# Altium PCB ATmega_2560_Pro.PcbDoc (part 3 of 4)
Units mil, origin at the board's own origin, x right, y up, seen from the top; angles counter-clockwise.
Board outline 2060 x 2060 mil, 4 copper layers (L1, L2, L3, L4), stack 61.583 mil thick; 50 components, 94 nets, 313 pads, 190 vias.
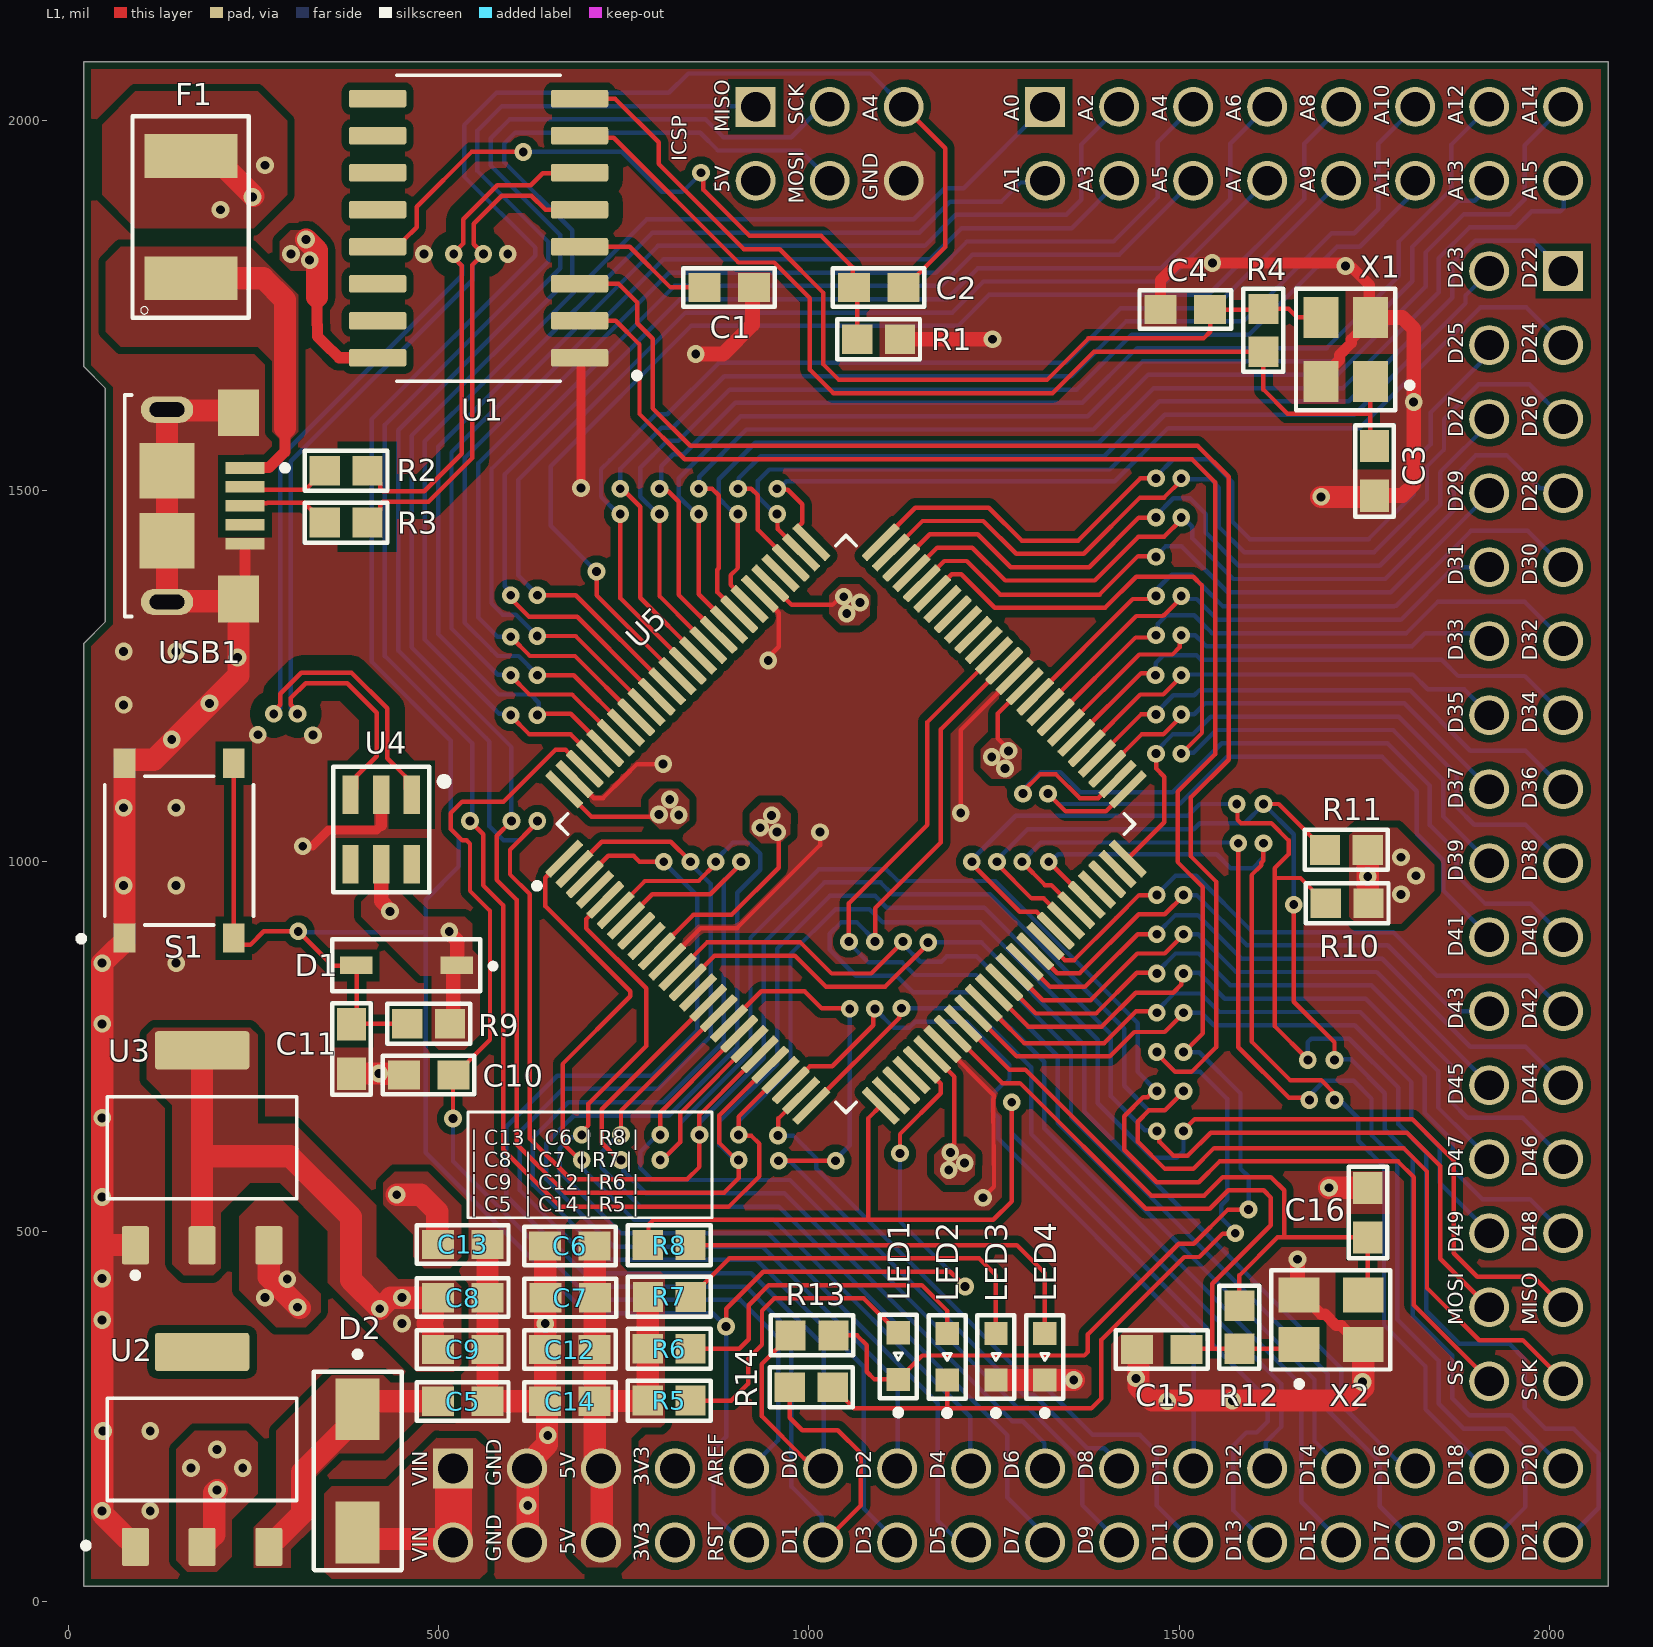
[diagram p0: L1 view]

## Part data (continued)
R5 R6 R7 R8 R13 R14: library part RC0603FR-071KL, "RES 1K OHM 1% 1/10W 0603", Case Code (Imperial)=0603, Manufacturer 1="Yageo Group", Max Operating Temperature=155°C, Min Operating Temperature=-55°C, Power Rating=100mW, Supplier Part Number 1=311-1.00KHRDKR-ND, Temperature Coefficient=100ppm/°C, Tolerance=1%, Voltage Rating=50V, Working Voltage=75V, Case Code (Metric)=0603, Case/Package=0603, China RoHS=Non-Compliant, ComponentLink1Description=https://datasheet.octopart.com:443/RC0603FR-071KL-Yageo-datasheet-175887523.pdf?src-supplier=Newark, ComponentLink1URL=https://datasheet.octopart.com:443/RC0603FR-071KL-Yageo-datasheet-175887523.pdf?src-supplier=Newark, ComponentLink2Description=https://datasheet.octopart.com:443/RC0603FR-071KL-Yageo-datasheet-34211833.pdf?src-supplier=Newark, ComponentLink2URL=https://datasheet.octopart.com:443/RC0603FR-071KL-Yageo-datasheet-34211833.pdf?src-supplier=Newark, ComponentLink3Description=https://datasheet.octopart.com:443/RC0603FR-071KL-Yageo-datasheet-12596169.pdf?src-supplier=Newark, ComponentLink3URL=https://datasheet.octopart.com:443/RC0603FR-071KL-Yageo-datasheet-12596169.pdf?src-supplier=Newark, ComponentLink4Description=https://datasheet.octopart.com:443/RC0603FR-071KL-Yageo-datasheet-499455.pdf?src-supplier=Newark, ComponentLink4URL=https://datasheet.octopart.com:443/RC0603FR-071KL-Yageo-datasheet-499455.pdf?src-supplier=Newark, ComponentLink5Description=https://datasheet.octopart.com:443/RC0603FR-071KL-Yageo-datasheet-503470.pdf?src-supplier=Newark, ComponentLink5URL=https://datasheet.octopart.com:443/RC0603FR-071KL-Yageo-datasheet-503470.pdf?src-supplier=Newark, ComponentLink6Description=https://datasheet.octopart.com:443/RC0603FR-071KL-Yageo-datasheet-62067350.pdf?src-supplier=element14+APAC, ComponentLink6URL=https://datasheet.octopart.com:443/RC0603FR-071KL-Yageo-datasheet-62067350.pdf?src-supplier=element14+APAC, ComponentLink7Description=https://datasheet.octopart.com:443/RC0603FR-071KL-Yageo-datasheet-21426514.pdf?src-supplier=element14+APAC, ComponentLink7URL=https://datasheet.octopart.com:443/RC0603FR-071KL-Yageo-datasheet-21426514.pdf?src-supplier=element14+APAC, ComponentLink8Description=https://datasheet.octopart.com:443/RC0603FR-071KL-Yageo-datasheet-141265859.pdf?src-supplier=Upverter, ComponentLink8URL=https://datasheet.octopart.com:443/RC0603FR-071KL-Yageo-datasheet-141265859.pdf?src-supplier=Upverter, ComponentLink9Description=https://datasheet.octopart.com:443/RC0603FR-071KL-Yageo-datasheet-103092701.pdf?src-supplier=Upverter, ComponentLink9URL=https://datasheet.octopart.com:443/RC0603FR-071KL-Yageo-datasheet-103092701.pdf?src-supplier=Upverter, ComponentLink10Description=https://sigma.octopart.com:443/138820526/technical_drawing/Yageo-RC0603FR-071KL.pdf?src-supplier=Upverter, ComponentLink10URL=https://sigma.octopart.com:443/138820526/technical_drawing/Yageo-RC0603FR-071KL.pdf?src-supplier=Upverter, ComponentLink11Description=https://datasheet.octopart.com:443/RC0603FR-071KL-Yageo-datasheet-68297981.pdf?src-supplier=Upverter, ComponentLink11URL=https://datasheet.octopart.com:443/RC0603FR-071KL-Yageo-datasheet-68297981.pdf?src-supplier=Upverter, ComponentLink12Description=https://datasheet.octopart.com:443/RC0603FR-071KL-Yageo-datasheet-8328172.pdf?src-supplier=Farnell, ComponentLink12URL=https://datasheet.octopart.com:443/RC0603FR-071KL-Yageo-datasheet-8328172.pdf?src-supplier=Farnell, ComponentLink13Description=https://datasheet.octopart.com:443/RC0603FR-071KL-Yageo-datasheet-13691069.pdf?src-supplier=Farnell, ComponentLink13URL=https://datasheet.octopart.com:443/RC0603FR-071KL-Yageo-datasheet-13691069.pdf?src-supplier=Farnell, ComponentLink14Description=https://datasheet.octopart.com:443/RC0603FR-071KL-Yageo-datasheet-15599030.pdf?src-supplier=Seeed+Studio, ComponentLink14URL=https://datasheet.octopart.com:443/RC0603FR-071KL-Yageo-datasheet-15599030.pdf?src-supplier=Seeed+Studio, ComponentLink15Description=https://datasheet.octopart.com:443/RC0603FR-071KL-Yageo-Group-datasheet-176638170.pdf?src-supplier=Future+Electronics, ComponentLink15URL=https://datasheet.octopart.com:443/RC0603FR-071KL-Yageo-Group-datasheet-176638170.pdf?src-supplier=Future+Electronics, ComponentLink16Description=https://datasheet.octopart.com:443/RC0603FR-071KL-Yageo-datasheet-164759695.pdf?src-supplier=Future+Electronics, ComponentLink16URL=https://datasheet.octopart.com:443/RC0603FR-071KL-Yageo-datasheet-164759695.pdf?src-supplier=Future+Electronics, ComponentLink17Description=https://datasheet.octopart.com:443/RC0603FR-071KL-Yageo-datasheet-137700087.pdf?src-supplier=Future+Electronics, ComponentLink17URL=https://datasheet.octopart.com:443/RC0603FR-071KL-Yageo-datasheet-137700087.pdf?src-supplier=Future+Electronics, ComponentLink18Description=https://datasheet.octopart.com:443/RC0603FR071KL-Yageo-datasheet-27584510.pdf?src-supplier=Future+Electronics, ComponentLink18URL=https://datasheet.octopart.com:443/RC0603FR071KL-Yageo-datasheet-27584510.pdf?src-supplier=Future+Electronics, ComponentLink19Description=https://datasheet.octopart.com:443/RC0603FR-071KL-Yageo-datasheet-8324193.pdf?src-supplier=Future+Electronics, ComponentLink19URL=https://datasheet.octopart.com:443/RC0603FR-071KL-Yageo-datasheet-8324193.pdf?src-supplier=Future+Electronics, ComponentLink20Description=https://datasheet.octopart.com:443/RC0603FR-071KL-Yageo-datasheet-79472498.pdf?src-supplier=Megastar, ComponentLink20URL=https://datasheet.octopart.com:443/RC0603FR-071KL-Yageo-datasheet-79472498.pdf?src-supplier=Megastar, ComponentLink21Description=https://datasheet.octopart.com/RC0603FR-071KL-Yageo-datasheet-73766026.pdf, ComponentLink21URL=https://datasheet.octopart.com/RC0603FR-071KL-Yageo-datasheet-73766026.pdf, ComponentLink22Description=https://datasheet.octopart.com:443/RC0603FR-071KL-Yageo-datasheet-118562.pdf?src-supplier=DigiKey, ComponentLink22URL=https://datasheet.octopart.com:443/RC0603FR-071KL-Yageo-datasheet-118562.pdf?src-supplier=DigiKey, ComponentLink23Description=http://sigma.octopart.com:80/conflict_mineral_statement/Yageo-company-3.pdf?src-supplier=Compliance+Statements, ComponentLink23URL=http://sigma.octopart.com:80/conflict_mineral_statement/Yageo-company-3.pdf?src-supplier=Compliance+Statements, ComponentLink24Description=http://sigma.octopart.com:80/rohs_statement/Yageo-company-2.pdf?src-supplier=Compliance+Statements, ComponentLink24URL=http://sigma.octopart.com:80/rohs_statement/Yageo-company-2.pdf?src-supplier=Compliance+Statements, Composition="Thick Film", Contact Plating=Tin, Country of Origin="Mainland China, Taiwan", Depth=800µm, Export Control Classification Number (ECCN) Code=EAR99, Harmonized Tariff Schedule (HTS) Code=8533.21.00.30, Height=450µm, Introduction Date=2004-10-04, Lead Free="Lead Free", Length=1.6mm, Lifecycle Status=Production, Manufacturer Part Number 1=RC0603FR-071KL, Military Standard=Not, Mounting Technology="Surface Mount", Number of Terminals=2, Packaging="Tape and Reel", Pins=2, Pricing 1="1=0.1, 10=0.025, 25=0.0188, 50=0.015, 100=0.0122, 250=0.0094, 500=0.00782, 1000=0.00661 (USD)", Radiation Hardening=No, REACH SVHC=Unaffected, RoHS=Compliant, Schedule B="8533210045, 8533210045|8533210045|8533210045|8533210045|8533210045|8533210045|8533210045|8533210045|8533210045|8533210045|8533210045|8533210045|8533210045|8533210045|8533210045|8533210045|8533210045|8533210045|8533210045|8533210045|8533210045|8533210045|8533210045|85", Stock 1=4851130, Supplier 1=DigiKey, Termination=SMD/SMT, Voltage Rating (DC)=50V, Width=800µm
S1: library part TS-1187A-B-A-B, "SWITCH TACTILE SPST-NO 0.05A 12V SMD 3X4MM"
U1: "USB to Serial UART Interface Controller IC, SOP-16, 5V/3.3V, 12MHz External Crystal Required"
U2: "IC REG LINEAR 5.1V 1A SOT-223-3L", Manufacturer=Revvo, Supplier Part Number=5272-AMS1117-5.0TR-ND, Category="LDO Voltage Regulators", Manufacturer Part Number=AMS1117-5.0, Pricing="2500=0.12353, 5000=0.11968, 7500=0.11775, 12500=0.11561, 17500=0.11436, 25000=0.11316 (USD)", Stock=12500, Supplier=DigiKey
U3: "IC REG LINEAR 3.3V 1A SOT-223-3L", Manufacturer="UMW(Youtai Semiconductor Co., Ltd.)", Supplier Part Number=4518-AMS1117-3.3TR-ND, Category="LDO Voltage Regulators", Manufacturer Part Number=AMS1117-3.3, Pricing="2500=0.1247, 5000=0.12082, 7500=0.11888, 12500=0.11673, 17500=0.11547, 25000=0.11426 (USD)", Stock=20000, Supplier=DigiKey
U4: library part SRV05-4MR6T1G, "TVS DIODE 5VWM 17.5VC 6TSOP", Breakdown Voltage=6V, Case/Package=TSOP, Clamping Voltage=17.5V, Leakage Current=5µA, Manufacturer=onsemi, Manufacturer Lifecycle Status=ACTIVE, Max Operating Temperature=125°C, Min Operating Temperature=-55°C, Peak Pulse Current=5A, Peak Pulse Power=300W, Power Line Protection=Yes, Reverse Standoff Voltage=5V, Supplier Part Number=488-SRV05-4MR6T1GDKR-ND, Category="TVS Diodes", China RoHS=Compliant, ComponentLink1Description=https://datasheet.octopart.com:443/SRV05-4MR6T1G-ON-Semiconductor-datasheet-101150056.pdf?src-supplier=Electro+Sonic, ComponentLink1URL=https://datasheet.octopart.com:443/SRV05-4MR6T1G-ON-Semiconductor-datasheet-101150056.pdf?src-supplier=Electro+Sonic, ComponentLink2Description=https://datasheet.octopart.com:443/SRV05-4MR6T1G-onsemi-datasheet-180969720.pdf?src-supplier=IHS, ComponentLink2URL=https://datasheet.octopart.com:443/SRV05-4MR6T1G-onsemi-datasheet-180969720.pdf?src-supplier=IHS, ComponentLink3Description=https://datasheet.octopart.com:443/SRV05-4MR6T1G-ON-Semiconductor-datasheet-37178284.pdf?src-supplier=Future+Electronics, ComponentLink3URL=https://datasheet.octopart.com:443/SRV05-4MR6T1G-ON-Semiconductor-datasheet-37178284.pdf?src-supplier=Future+Electronics, ComponentLink4Description=https://datasheet.octopart.com:443/SRV05-4MR6T1G-ON-Semiconductor-datasheet-100437403.pdf?src-supplier=Farnell, ComponentLink4URL=https://datasheet.octopart.com:443/SRV05-4MR6T1G-ON-Semiconductor-datasheet-100437403.pdf?src-supplier=Farnell, ComponentLink5Description=https://datasheet.octopart.com:443/SRV05-4MR6T1G-onsemi-datasheet-164731279.pdf?src-supplier=Newchip+Electronics+Limited, ComponentLink5URL=https://datasheet.octopart.com:443/SRV05-4MR6T1G-onsemi-datasheet-164731279.pdf?src-supplier=Newchip+Electronics+Limited, ComponentLink6Description=http://sigma.octopart.com:80/150631685/rohs_statement/ON-Semiconductor-SRV05-4MR6T1G.pdf?src-supplier=Compliance+Statements, ComponentLink6URL=http://sigma.octopart.com:80/150631685/rohs_statement/ON-Semiconductor-SRV05-4MR6T1G.pdf?src-supplier=Compliance+Statements, ComponentLink7Description=http://sigma.octopart.com:80/reach_statement/ON-Semiconductor-company-79.pdf?src-supplier=Compliance+Statements, ComponentLink7URL=http://sigma.octopart.com:80/reach_statement/ON-Semiconductor-company-79.pdf?src-supplier=Compliance+Statements, ComponentLink8Description=https://octopart.com:443/opatz8j6/c1?t=GRxjOYfY8n1k7dEGnypKsoXJdizG2AyD9Dp9f5Qv8c1VKoN6Hi3oNDCVMFQ1YA2smcwUYk7_76S3Ef3Va8VDMphxCFMUbAegA5s6gVuY1yDEeomlnwz1aAKRIpnWkIz8LXicEWMcXhbWzpBI80n6_k_-slWBpLxY0NALUvjCUcDg2IL1fScQjZ7PuufKuxm_nn3UzkM4saBqj0lTwdOAMWbn7IoLSNr2avL33e6zQMcHuFNsVRsb1LLhsdyz2XVsDLyzl6dAmv0uXcf72h1DDLkKQol2Y6UBQGHK0dqwsy23JJC0slEMc9s0aJfe8dT4jPLvdDcjp3fcfNZxSGJOQqM-c0A9ey8i6J50A0KjVuwk&src-supplier=Compliance+Statements, ComponentLink8URL=https://octopart.com:443/opatz8j6/c1?t=GRxjOYfY8n1k7dEGnypKsoXJdizG2AyD9Dp9f5Qv8c1VKoN6Hi3oNDCVMFQ1YA2smcwUYk7_76S3Ef3Va8VDMphxCFMUbAegA5s6gVuY1yDEeomlnwz1aAKRIpnWkIz8LXicEWMcXhbWzpBI80n6_k_-slWBpLxY0NALUvjCUcDg2IL1fScQjZ7PuufKuxm_nn3UzkM4saBqj0lTwdOAMWbn7IoLSNr2avL33e6zQMcHuFNsVRsb1LLhsdyz2XVsDLyzl6dAmv0uXcf72h1DDLkKQol2Y6UBQGHK0dqwsy23JJC0slEMc9s0aJfe8dT4jPLvdDcjp3fcfNZxSGJOQqM-c0A9ey8i6J50A0KjVuwk&src-supplier=Compliance+Statements, ComponentLink9Description=https://octopart.com:443/opatz8j6/c1?t=lIUu1jb1ZZRo0qNmGIs9ba_OX116NqmQw_7oX-a3VPsaRdpp2HX_z2MCNOU07deCx-7PfvGmO6_0MJ30XVqsocWFNYMuX7jSZV6OPR9qZBLnVN_NcijYgOZ6fSGcJacu18z9XUouhaVhsRzrXPPLHaw78_5sQ7NBQwHcDioWErEMnZRHVeQUftrR8xKUYOxNwSSeqHi24SW0Dez_z3TsJuZaMiNnjW8b7pRvXBZcZ57ZArFUxPiKq0rrWhwKV2e6QnTz9xddmIQnZCvSJURlCU66Y9JTKD93_tff41mJUd2RJ-VHH_GdqJ18jt0FG4i79NtaZFXnkA15LDipeISURt08TJ8Mcy9aqVk_kUsfhXY&src-supplier=Compliance+Statements, ComponentLink9URL=https://octopart.com:443/opatz8j6/c1?t=lIUu1jb1ZZRo0qNmGIs9ba_OX116NqmQw_7oX-a3VPsaRdpp2HX_z2MCNOU07deCx-7PfvGmO6_0MJ30XVqsocWFNYMuX7jSZV6OPR9qZBLnVN_NcijYgOZ6fSGcJacu18z9XUouhaVhsRzrXPPLHaw78_5sQ7NBQwHcDioWErEMnZRHVeQUftrR8xKUYOxNwSSeqHi24SW0Dez_z3TsJuZaMiNnjW8b7pRvXBZcZ57ZArFUxPiKq0rrWhwKV2e6QnTz9xddmIQnZCvSJURlCU66Y9JTKD93_tff41mJUd2RJ-VHH_GdqJ18jt0FG4i79NtaZFXnkA15LDipeISURt08TJ8Mcy9aqVk_kUsfhXY&src-supplier=Compliance+Statements, Depth=1.5mm, Direction=Unidirectional, Lead Free="Lead Free", Length=3mm, Lifecycle Status=Production, Manufacturer Part Number=SRV05-4MR6T1G, Min Breakdown Voltage=6V, Number of Bidirectional Channels=4, Number of Channels=4, Number of Elements=1, Number of Terminals=6, Packaging="Tape and Reel", Peak Reverse Current=5µA, Pins=6, Polarity=Unidirectional, Pricing="1=3.34, 10=2.171, 50=1.6658, 100=1.503, 500=1.21752 (USD)", Radiation Hardening=No, REACH SVHC=Unaffected, RoHS=Compliant, Schedule B="8536300000, 8536300000|8536300000|8536300000|8536300000|8536300000", Stock=11826, Supplier=DigiKey, Working Voltage=5V
U5: "IC MCU 8BIT 256KB FLASH 100TQFP", Case/Package=TQFP, Clock Frequency=16MHz, Manufacturer=Microchip, Manufacturer Lifecycle Status=REL, Max Operating Temperature=85°C, Max Supply Voltage=5.5V, Min Operating Temperature=-40°C, Min Supply Voltage=4.5V, Operating Supply Voltage=5V, Supplier Part Number=ATMEGA2560-16AU-ND, Access Time=16µs, Category=Microcontrollers, ComponentLink1Description=https://datasheet.octopart.com:443/ATMEGA2560-16AU-Microchip-datasheet-141243538.pdf?src-supplier=Microchip, ComponentLink1URL=https://datasheet.octopart.com:443/ATMEGA2560-16AU-Microchip-datasheet-141243538.pdf?src-supplier=Microchip, ComponentLink2Description=https://datasheet.octopart.com:443/ATMEGA2560-16AU-Microchip-datasheet-24967521.pdf?src-supplier=element14+APAC, ComponentLink2URL=https://datasheet.octopart.com:443/ATMEGA2560-16AU-Microchip-datasheet-24967521.pdf?src-supplier=element14+APAC, ComponentLink3Description=https://datasheet.octopart.com:443/ATMEGA2560-16AU-Microchip-datasheet-62057665.pdf?src-supplier=element14+APAC, ComponentLink3URL=https://datasheet.octopart.com:443/ATMEGA2560-16AU-Microchip-datasheet-62057665.pdf?src-supplier=element14+APAC, ComponentLink4Description=https://datasheet.octopart.com:443/ATMEGA2560-16AU-Microchip-datasheet-46907977.pdf?src-supplier=SHENGYU+ELECTRONICS, ComponentLink4URL=https://datasheet.octopart.com:443/ATMEGA2560-16AU-Microchip-datasheet-46907977.pdf?src-supplier=SHENGYU+ELECTRONICS, ComponentLink5Description=https://sigma.octopart.com:443/138797047/technical_drawing/Microchip-ATMEGA2560-16AU.pdf?src-supplier=Upverter, ComponentLink5URL=https://sigma.octopart.com:443/138797047/technical_drawing/Microchip-ATMEGA2560-16AU.pdf?src-supplier=Upverter, ComponentLink6Description=https://datasheet.octopart.com:443/ATMEGA2560-16AU-Microchip-datasheet-136948588.pdf?src-supplier=Master+Electronics, ComponentLink6URL=https://datasheet.octopart.com:443/ATMEGA2560-16AU-Microchip-datasheet-136948588.pdf?src-supplier=Master+Electronics, ComponentLink7Description=https://datasheet.octopart.com:443/ATMEGA2560-16AU-Atmel-datasheet-5357710.pdf?src-supplier=TME, ComponentLink7URL=https://datasheet.octopart.com:443/ATMEGA2560-16AU-Atmel-datasheet-5357710.pdf?src-supplier=TME, ComponentLink8Description=https://datasheet.octopart.com:443/ATMEGA2560-16AU-Microchip-datasheet-12542.pdf?src-supplier=element14, ComponentLink8URL=https://datasheet.octopart.com:443/ATMEGA2560-16AU-Microchip-datasheet-12542.pdf?src-supplier=element14, ComponentLink9Description=https://datasheet.octopart.com:443/ATMEGA2560-16AU-Atmel-datasheet-13399453.pdf?src-supplier=_legacy+Avnet, ComponentLink9URL=https://datasheet.octopart.com:443/ATMEGA2560-16AU-Atmel-datasheet-13399453.pdf?src-supplier=_legacy+Avnet, ComponentLink10Description=https://datasheet.octopart.com:443/ATMEGA2560-16AU-Microchip-datasheet-120916.pdf?src-supplier=RS+(Formerly+Allied+Electronics), ComponentLink10URL=https://datasheet.octopart.com:443/ATMEGA2560-16AU-Microchip-datasheet-120916.pdf?src-supplier=RS+(Formerly+Allied+Electronics), ComponentLink11Description=http://sigma.octopart.com:80/188449921/materials_sheet/Microchip-ATMEGA2560-16AU.pdf?src-supplier=Compliance+Statements, ComponentLink11URL=http://sigma.octopart.com:80/188449921/materials_sheet/Microchip-ATMEGA2560-16AU.pdf?src-supplier=Compliance+Statements, ComponentLink12Description=http://sigma.octopart.com:80/rohs_statement/Microchip-company-71.pdf?src-supplier=Compliance+Statements, ComponentLink12URL=http://sigma.octopart.com:80/rohs_statement/Microchip-company-71.pdf?src-supplier=Compliance+Statements, ComponentLink13Description=http://sigma.octopart.com:80/reach_statement/Microchip-company-70.pdf?src-supplier=Compliance+Statements, ComponentLink13URL=http://sigma.octopart.com:80/reach_statement/Microchip-company-70.pdf?src-supplier=Compliance+Statements, ComponentLink14Description=http://sigma.octopart.com:80/conflict_mineral_statement/Microchip-company-69.pdf?src-supplier=Compliance+Statements, ComponentLink14URL=http://sigma.octopart.com:80/conflict_mineral_statement/Microchip-company-69.pdf?src-supplier=Compliance+Statements, ComponentLink15Description=http://sigma.octopart.com:80/conflict_mineral_statement/Microchip-company-68.pdf?src-supplier=Compliance+Statements, ComponentLink15URL=http://sigma.octopart.com:80/conflict_mineral_statement/Microchip-company-68.pdf?src-supplier=Compliance+Statements, ComponentLink16Description=http://sigma.octopart.com:80/reach_statement/Atmel-company-6.pdf?src-supplier=Compliance+Statements, ComponentLink16URL=http://sigma.octopart.com:80/reach_statement/Atmel-company-6.pdf?src-supplier=Compliance+Statements, ComponentLink17Description=http://sigma.octopart.com:80/rohs_statement/Atmel-company-5.pdf?src-supplier=Compliance+Statements, ComponentLink17URL=http://sigma.octopart.com:80/rohs_statement/Atmel-company-5.pdf?src-supplier=Compliance+Statements, ComponentLink18Description=http://sigma.octopart.com:80/rohs_statement/Atmel-company-4.pdf?src-supplier=Compliance+Statements, ComponentLink18URL=http://sigma.octopart.com:80/rohs_statement/Atmel-company-4.pdf?src-supplier=Compliance+Statements, Core Architecture=AVR, Country of Assembly=Thailand, Country of Fabrication="United States of America", Country of Origin=Thailand, Data Bus Width=8b, Density=2Mb, Export Control Classification Number (ECCN) Code=EAR99, Frequency=16MHz, Harmonized Tariff Schedule (HTS) Code=8542.31.0015, Height=1.2mm, HS Code=8542.31.0015, Interface="2-Wire, I2C, SPI, USART", Lead Free="Lead Free", Length=14.1mm, Lifecycle Status=Production, Manufacturer Part Number=ATMEGA2560-16AU, Memory Format=FLASH, Memory Size=256kB, Mounting Technology="Surface Mount", Number of A/D Converters=1, Number of ADC Channels=16, Number of I2C Channels=1, Number of I/Os=86, Number of Programmable I/O=86, Number of PWM Channels=20, Number of SPI Channels=5, Number of Terminals=100, Number of Timers/Counters=6, Number of UART Channels=4, Oscillator Type=Internal, Peripherals="Brown-out Detect/Reset, POR, PWM, WDT", Pins=100, Pricing="1=18.11 (USD)", Projected EOL Date=2039-11-01, Radiation Hardening=No, RAM Size=8kB, REACH SVHC=Unaffected, RoHS=Compliant, Schedule B="8542310000, 8542310000|8542310000|8542310000|8542310000|8542310000", Stock=12847, Supplier=DigiKey, Termination=SMD/SMT, Watchdog Timer=Yes, Width=14.1mm
USB1: library part 10118193-0001LF, "CONN RCPT USB2.0 MICRO B SMD R/A", Color=Black, Contact Resistance=30mΩ, Current Rating=1.8A, Dielectric Material="Liquid Crystal Polymer", Flammability Rating="UL94 V-0", Insulation Resistance=1GΩ, Manufacturer="Amphenol Communications Solutions", Max Operating Temperature=80°C, Max Voltage Rating (AC)=100V, Min Operating Temperature=-55°C, Operating Force=35.1392N, Supplier Part Number=609-4616-1-ND, Category="USB Connectors", China RoHS=Compliant, ComponentLink1Description=https://datasheet.octopart.com:443/10118193-0001LF-Amphenol-Communications-Solutions-datasheet-182239125.pdf?src-supplier=IHS, ComponentLink1URL=https://datasheet.octopart.com:443/10118193-0001LF-Amphenol-Communications-Solutions-datasheet-182239125.pdf?src-supplier=IHS, ComponentLink2Description=https://datasheet.octopart.com:443/10118193-0001LF-Amphenol-Communications-Solutions-datasheet-55953155.pdf?src-supplier=TME, ComponentLink2URL=https://datasheet.octopart.com:443/10118193-0001LF-Amphenol-Communications-Solutions-datasheet-55953155.pdf?src-supplier=TME, ComponentLink3Description=https://datasheet.octopart.com:443/10118193-0001LF-Amphenol-ICC-datasheet-116246833.pdf?src-supplier=Upverter, ComponentLink3URL=https://datasheet.octopart.com:443/10118193-0001LF-Amphenol-ICC-datasheet-116246833.pdf?src-supplier=Upverter, ComponentLink4Description=https://datasheet.octopart.com:443/10118193-0001LF-FCI-datasheet-141913714.pdf?src-supplier=Upverter, ComponentLink4URL=https://datasheet.octopart.com:443/10118193-0001LF-FCI-datasheet-141913714.pdf?src-supplier=Upverter, ComponentLink5Description=https://datasheet.octopart.com:443/10118193-0001LF-Amphenol-Communications-Solutions-datasheet-96019471.pdf?src-supplier=element14+APAC, ComponentLink5URL=https://datasheet.octopart.com:443/10118193-0001LF-Amphenol-Communications-Solutions-datasheet-96019471.pdf?src-supplier=element14+APAC, ComponentLink6Description=https://datasheet.octopart.com:443/10118193-0001LF-Amphenol-Communications-Solutions-datasheet-11792339.pdf?src-supplier=Electro+Sonic, ComponentLink6URL=https://datasheet.octopart.com:443/10118193-0001LF-Amphenol-Communications-Solutions-datasheet-11792339.pdf?src-supplier=Electro+Sonic, ComponentLink7Description=https://datasheet.octopart.com:443/10118193-0001LF-Amphenol-Communications-Solutions-datasheet-13702206.pdf?src-supplier=RS+(Formerly+Allied+Electronics), ComponentLink7URL=https://datasheet.octopart.com:443/10118193-0001LF-Amphenol-Communications-Solutions-datasheet-13702206.pdf?src-supplier=RS+(Formerly+Allied+Electronics), Connector Type="Receptacle, USB", Contact Material="Gold, Nickel", Contact Plating=Gold, Depth=5.67mm, Features=Shielded, Gender=Female, Height=3mm, Housing Material=Polymer, Length=7.86mm, Lifecycle Status=Production, Manufacturer Part Number=10118193-0001LF, Mounting Technology="Horizontal, Surface Mount", Number of Contacts=5, Number of Ports=1, Number of Positions=5, Number of Rows=1, Number of Terminals=5, Orientation="Right Angle", Pins=11, Pitch=650µm, Plating Thickness=762nm, Pricing="1=0.5, 10=0.422, 25=0.3952, 50=0.3762, 100=0.3583, 250=0.3358, 500=0.31976 (USD)", Radiation Hardening=No, REACH SVHC=Unaffected, RoHS=Compliant, Shell Material="Stainless Steel", Stock=63727, Supplier=DigiKey, Terminal Pitch=660.4µm, Termination=Solder, USB Standard="USB 2.0", Voltage Rating=100V
X1: library part 7M-12.000MAAJ-T, "CRYSTAL 12.0000MHZ 18PF SMD", Case/Package=SMD/SMT, ESR (Equivalent Series Resistance)=80Ω, Frequency Stability=30ppm, Frequency Tolerance=0.003%, Load Capacitance=18pF, Manufacturer 1=TXC, Max Operating Temperature=70°C, Min Operating Temperature=-20°C, Supplier Part Number 1=887-1121-2-ND, China RoHS=Compliant, ComponentLink1Description=https://datasheet.octopart.com:443/7M-12.000MAAJ-T-TXC-datasheet-175949319.pdf?src-supplier=Newark, ComponentLink1URL=https://datasheet.octopart.com:443/7M-12.000MAAJ-T-TXC-datasheet-175949319.pdf?src-supplier=Newark, ComponentLink2Description=https://datasheet.octopart.com:443/7M-12.000MAAJ-T-TXC-datasheet-142346318.pdf?src-supplier=TME, ComponentLink2URL=https://datasheet.octopart.com:443/7M-12.000MAAJ-T-TXC-datasheet-142346318.pdf?src-supplier=TME, ComponentLink3Description=https://datasheet.octopart.com:443/7M-12.000MAAJ-T-TXC-datasheet-24897103.pdf?src-supplier=ODG+(Origin+Data+Global), ComponentLink3URL=https://datasheet.octopart.com:443/7M-12.000MAAJ-T-TXC-datasheet-24897103.pdf?src-supplier=ODG+(Origin+Data+Global), ComponentLink4Description=https://datasheet.octopart.com:443/7M-12.000MAAJ-T-TXC-datasheet-10340792.pdf?src-supplier=element14+APAC, ComponentLink4URL=https://datasheet.octopart.com:443/7M-12.000MAAJ-T-TXC-datasheet-10340792.pdf?src-supplier=element14+APAC, ComponentLink5Description=https://datasheet.octopart.com:443/7M-12.000MAAJ-T-TXC-datasheet-15207195.pdf?src-supplier=element14+APAC, ComponentLink5URL=https://datasheet.octopart.com:443/7M-12.000MAAJ-T-TXC-datasheet-15207195.pdf?src-supplier=element14+APAC, ComponentLink6Description=https://datasheet.octopart.com:443/7M-12.000MAAJ-T-TXC-datasheet-8857452.pdf?src-supplier=Farnell, ComponentLink6URL=https://datasheet.octopart.com:443/7M-12.000MAAJ-T-TXC-datasheet-8857452.pdf?src-supplier=Farnell, ComponentLink7Description=https://datasheet.octopart.com:443/7M-12.000MAAJ-T-TXC-datasheet-10545748.pdf?src-supplier=Farnell, ComponentLink7URL=https://datasheet.octopart.com:443/7M-12.000MAAJ-T-TXC-datasheet-10545748.pdf?src-supplier=Farnell, ComponentLink8Description=https://datasheet.octopart.com:443/7M-12.000MAAJ-T-TXC-datasheet-10379982.pdf?src-supplier=Farnell, ComponentLink8URL=https://datasheet.octopart.com:443/7M-12.000MAAJ-T-TXC-datasheet-10379982.pdf?src-supplier=Farnell, Country of Origin="Mainland China", Depth=2.5mm, ESR=80Ω, Frequency=12MHz, Harmonized Tariff Schedule (HTS) Code=8541.60.00.50, Height=800µm, Introduction Date=2009-02-20, Lead Free="Lead Free", Length=3.2mm, Lifecycle Status=Production, Manufacturer Part Number 1=7M-12.000MAAJ-T, Mounting Technology="Surface Mount", Packaging="Tape & Reel", Pins=4, Pricing 1="3000=0.54592, 6000=0.52337, 9000=0.51063, 15000=0.49502 (USD)", REACH SVHC=Unaffected, RoHS=Compliant, Schedule B="8541600080, 8541600080|8541600080|8541600080|8541600080|8541600080", Stock 1=8397, Supplier 1=DigiKey, Termination=SMD/SMT, Tolerance=0.003%, Width=2.4892mm
X2: library part 7M-16.000MAAJ-T, "CRYSTAL 16.0000MHZ 18PF SMD", Case/Package=SMD/SMT, ESR (Equivalent Series Resistance)=60Ω, Frequency=16MHz, Frequency Stability=30ppm, Frequency Tolerance=0.003%, Load Capacitance=18pF, Manufacturer 1=TXC, Max Operating Temperature=70°C, Min Operating Temperature=-20°C, Supplier Part Number 1=887-1125-1-ND, China RoHS=Compliant, ComponentLink1Description=https://datasheet.octopart.com:443/7M-16.000MAAJ-T-TXC-datasheet-175949319.pdf?src-supplier=Newark, ComponentLink1URL=https://datasheet.octopart.com:443/7M-16.000MAAJ-T-TXC-datasheet-175949319.pdf?src-supplier=Newark, ComponentLink2Description=https://datasheet.octopart.com:443/7M-16.000MAAJ-T-TXC-datasheet-142346318.pdf?src-supplier=TME, ComponentLink2URL=https://datasheet.octopart.com:443/7M-16.000MAAJ-T-TXC-datasheet-142346318.pdf?src-supplier=TME, ComponentLink3Description=https://datasheet.octopart.com:443/7M-16.000MAAJ-T-TXC-datasheet-24897103.pdf?src-supplier=element14+APAC, ComponentLink3URL=https://datasheet.octopart.com:443/7M-16.000MAAJ-T-TXC-datasheet-24897103.pdf?src-supplier=element14+APAC, ComponentLink4Description=https://datasheet.octopart.com:443/7M-16.000MAAJ-T-TXC-datasheet-10340792.pdf?src-supplier=Future+Electronics, ComponentLink4URL=https://datasheet.octopart.com:443/7M-16.000MAAJ-T-TXC-datasheet-10340792.pdf?src-supplier=Future+Electronics, ComponentLink5Description=https://datasheet.octopart.com:443/7M-16.000MAAJ-T-TXC-datasheet-8857452.pdf?src-supplier=Farnell, ComponentLink5URL=https://datasheet.octopart.com:443/7M-16.000MAAJ-T-TXC-datasheet-8857452.pdf?src-supplier=Farnell, ComponentLink6Description=https://datasheet.octopart.com:443/7M-16.000MAAJ-T-TXC-datasheet-10545748.pdf?src-supplier=Farnell, ComponentLink6URL=https://datasheet.octopart.com:443/7M-16.000MAAJ-T-TXC-datasheet-10545748.pdf?src-supplier=Farnell, ComponentLink7Description=https://datasheet.octopart.com:443/7M-16.000MAAJ-T-TXC-datasheet-10379982.pdf?src-supplier=Farnell, ComponentLink7URL=https://datasheet.octopart.com:443/7M-16.000MAAJ-T-TXC-datasheet-10379982.pdf?src-supplier=Farnell, Country of Origin="Mainland China", Depth=2.5mm, ESR=60Ω, Height=800µm, Introduction Date=2014-01-27, Length=3.2mm, Lifecycle Status=Production, Manufacturer Part Number 1=7M-16.000MAAJ-T, Mounting Technology="Surface Mount", Packaging="Tape & Reel", Pins=4, Pricing 1="1=0.64, 10=0.553, 25=0.5228, 50=0.501, 100=0.4803, 250=0.45424, 500=0.43544, 1000=0.41743 (USD)", REACH SVHC=Unaffected, RoHS=Compliant, Schedule B="8541600080, 8541600080|8541600080|8541600080|8541600080|8541600080", Stock 1=43226, Supplier 1=DigiKey, Termination=SMD/SMT, Tolerance=0.003%, Width=2.5mm

## Via types
v1: diameter 24, hole 12, L1 to L4, tented both sides, 190 vias

## Nets (pads, with @x,y where several pads share a name; then routed paths per layer and width w, separated by ;. In a path a pad name is that pad's centre, name@x,y a point inside that pad or via, vN(x,y) a via of type N, cw(c..) or ccw(c..) an arc to the next point about the centre after c; other vN are vias at no path point)
3.3V: C8.2 C9.2 H1.07 H1.08 U3.2 | length 1492.5
  L1 w30: U3.2@180,503.97 180,603 181,604 ; U3.2@180,744.2 180,605 181,604 ; C9.2@498.54,339.98 496.57,339.98 491.88,344.67 491.88,368.12 485,375 491.88,381.88 491.88,405.3 C8.2@496.57,409.98 ; C8.2@498.54,409.98 C8.2@496.57,409.98 ; 181,604 184,601 299,601 381,519 381,434 v1(420,395) 434.98,409.98 C8.2@496.57,409.98
  L3 w50: v1(450,375) 485,375 560,450 714,450 820,344 820,179.23 H1.08@820,79.23
  other v1: 450,410
+5V: C6.2 C7.2 C12.2 C13.2 C14.2 D1.1 F1.2 H1.05 H1.06 H4.02 R5.1 R6.1 R7.1 R9.2 R10.2 R11.2 U1.16 U2.2 U3.3 U4.5 U5.10 U5.31 U5.61 U5.80 U5.100 | length 8704.5
  L1 w6: U5.100@669.16,1096.77 706.11,1059.82 794.44,1059.82 v1(797.3,1062.68) ; U5.10@794.44,877.96 843.88,927.39 895.39,927.39 959,991 959,1037 v1(957,1039) ; U5.80@947.55,1375.16 976.71,1346 1031.67,1346 1042.67,1357 v1(1047,1357) ; U5.31@1166.37,738.76 1166.37,738.52 1196.12,708.76 1196.12,618.51 1194.44,616.83 1194.44,609.44 v1(1191,606) ; v1(1269.42,1148.83) 1269.42,1151.21 1255,1165.63 1255,1199.32 U5.61@1291.64,1235.96
  L1 w15: 335.31,1761.86 335.31,1724.69 335.79,1724.21 335.79,1708.97 344.76,1700 364.76,1680 U1.16@417.17,1680
  L1 w20: U4.5@422,995.56 422,946 v1@435,933 ; v1@513,904 524.83,892.17 D1.1@524.83,860.01 ; R9.2@515,780.01 519.46,784.47 519.46,854.67 523.78,859 D1.1@523.91,859
  L1 w30: F1.2@165,1952.68 198.46,1952.68 212.99,1938.15 212.99,1935.01 v1@249.5,1898.5 ; U2.2@180,73.31 196.32,89.63 196.32,146.32 v1(200,150) ; U3.3@270.16,480.81 270.16,437.84 284,424 v1@312,396 ; v1(320.41,1839.84) 335.31,1824.94 335.31,1761.86 ; v1(443,549) 475,549 497.77,526.23 497.77,482.79 C13.2@498.54,482.02 ; C6.2@710.93,480.45 C6.2@710.46,479.98 710.61,479.84 710.61,410.01 C7.2@710.75,409.86 710.61,409.72 710.61,340.13 C12.2@710.46,339.98 C14.2@710.45,269.98 ; H1.06@720,79.23 720,185.71 710.45,195.26 C14.2@710.45,269.98 ; R5.1@782.06,271 781.55,270.49 710.96,270.49 C14.2@710.45,269.98 ; R5.1@782.06,271 R6.1@782.13,341.01 ; R6.1@782.13,341.01 782.24,341.13 782.24,410.9 R7.1@782.36,411.02 ; R11.2@1754.94,1015 1755,1014.94 v1(1755,979) 1755,943.94 R10.2@1755.44,943.5
  L3 w50: v1(165,180) 197.5,180 200,177.5 ; v1(200,150) 200,177.5 ; v1(205,1880) 222,1897 v1(248,1897) ; v1(235,180) 200,180 ; v1(265,410) 278,397 v1(309,397) ; v1(265,1940) 265,1914 v1(248,1897) ; 293.5,381.5 200,288 v1(200,205) 200,180 ; v1(295,435) 309,421 v1(309,397) ; v1(325.36,1811.79) 325.36,1834.89 v1(320.41,1839.84) 340.57,1860 365,1860 ; v1(434,932) 461,905 v1(514,905) ; H1.06@720,79.23 720,259.85 684.85,295 411,295 v1(309,397) ; v1@822.34,1062.14 v1(824.05,1062.14) ; H4.02@928,1920 H4.02@928,1919 1068.95,1778.05 v1@1068.95,1352.44 ; v1(934.1,1044.89) 934.1,1061.44 934.1,1129.66 1068.95,1264.51 1068.95,1316.64 v1(1051.05,1334.54) v1@1068.95,1352.44 ; 946.5,1028.5 998.25,976.75 998.25,757.75 1041.5,714.5 1133.5,714.5 1210.34,637.66 v1(1210.34,592.03) ; v1(957,1039) 934.47,1039 911.32,1062.14 v1(824.05,1062.14) ; v1(1246.95,1140.46) 1255.32,1148.83 v1(1269.42,1148.83) ; v1@1263.74,1151 1331,1151 1420,1062 1493,1062 1560,1129 1649,1129 1755,1023 v1(1755,979) 1774,979 ; 1272,1165.51 1272,1263 1178,1357 1073.51,1357 v1@1068.95,1352.44 ; v1(1800,955) 1776,979 1774,979 ; 1800,979 1819,979 v1(1820,980) ; v1(1800,1005) 1774,979 ; 200,177.5 200,180 ; v1(248,1897) 328,1897 352.5,1872.5 365,1860 ; v1(309,397) 377,465 419.57,465 443,488.43 v1(443,549) 457,563 457,668 523,734 523,896 v1(514,905) ; 365,1860 385,1840 385,1330 465,1250 465,1016 524.29,956.71 524.29,915.29 v1(514,905) ; v1(514,905) 616,1007 681.16,1007 757.13,1082.97 803.22,1082.97 v1(824.05,1062.14)
  other v1: 1188.84,582.65 949.55,1061.69 811.84,1082.97 1265,1125 1068.95,1349.29 300,1820
A0: H3.01 U5.97 | length 1593.3
  L1 w6: v1(597,1197.03) 597,1196.26 622.23,1171.03 678.18,1171.03 710.68,1138.53 U5.97@710.92,1138.53
  L4 w6: v1@598.97,1197.03 596.88,1199.12 581.15,1199.12 573.26,1207 481,1299.26 481,1567 559,1645 781,1867 1141.54,1867 1183.54,1909 1209,1909 H3.01@1320,2020
A1: H3.02 U5.96 | length 1519.9
  L1 w6: v1@638,1199 678.29,1199 U5.96@724.84,1152.45
  L4 w6: v1@638,1199 635.03,1201.97 635.03,1213.97 624,1225 580.72,1225 499,1306.72 499,1559.54 583,1643.54 788.46,1849 1149,1849 1191,1891 1260,1891 1285.72,1916.72 1316.72,1916.72 H3.02@1320,1920
  other v1: 633,1197.03
A2: H3.03 U5.95 | length 1661.8
  L1 w6: v1(597,1251) 597,1250.23 622.23,1225 679.88,1225 719.2,1185.69 719.44,1185.69 U5.95@738.76,1166.37
  L4 w6: v1(597,1251) 596.44,1251.56 579.62,1251.56 517,1314.18 517,1552.09 601,1636.09 795.91,1831 1156.46,1831 1198.46,1873 1347.54,1873 1368,1893.46 1368,1968 H3.03@1420,2020
A3: H3.04 U5.94 | length 1540.2
  L1 w6: v1(633,1251) 681.97,1251 U5.94@752.68,1180.29
  L4 w6: v1(633,1251) 633,1251.77 607.77,1277 579.63,1277 571.62,1285.01 535,1321.63 535,1544.63 590,1599.63 803.37,1813 1163.91,1813 1205.91,1855 1355,1855 H3.04@1420,1920
A4: H3.05 U5.93 | length 1688.2
  L1 w6: v1(597,1303) 623,1277 683.81,1277 U5.93@766.6,1194.21
  L4 w6: v1(597,1303) 579.07,1303.01 553,1329.09 553,1537.18 810.82,1795 1171.37,1795 1213.37,1837 1411.54,1837 1471,1896.46 1471,1971 H3.05@1520,2020
A5: H3.06 U5.92 | length 1559.7
  L1 w6: v1(632.77,1304) 684.64,1304 U5.92@780.52,1208.12
  L4 w6: v1(632.77,1304) 603.77,1333 586.23,1333 571,1348.23 571,1529.72 614,1572.72 818.28,1777 1178.82,1777 1220.82,1819 1419,1819 H3.06@1520,1920
A6: H3.07 U5.91 | length 1703.2
  L1 w6: v1@594.67,1357 621.67,1330 686.73,1330 775.12,1241.61 775.12,1241.36 U5.91@794.44,1222.04
  L4 w6: v1(597,1359) 597,1363.33 589,1371.33 589,1522.26 625,1558.26 825.73,1759 1186.28,1759 1228.28,1801 1475.54,1801 1569,1894.46 1569,1969 H3.07@1620,2020
A7: H3.08 U5.90 | length 1575.9
  L1 w6: v1@631,1359 661.49,1359 661.66,1359.17 684.91,1359.17 808.11,1235.96 U5.90@808.36,1235.96
  L4 w6: v1(633,1359) 633,1359.77 607,1385.77 607,1514.81 643,1550.81 833.19,1741 1193.73,1741 1235.73,1783 1483,1783 H3.08@1620,1920
A8: H3.09 U5.89 | length 1668.7
  L1 w6: v1(713,1391) 713,1359.16 U5.89@822.28,1249.88
  L4 w6: v1(713,1391) 651,1453 651,1533.35 840.65,1723 1201.19,1723 1243.19,1765 1539.54,1765 1669,1894.46 1669,1969 H3.09@1720,2020
A9: H3.10 U5.88 | length 1474.4
  L1 w6: v1@745,1465 745,1355.24 836.2,1264.05 U5.88@836.2,1263.8
  L4 w6: v1(745,1469) 742.23,1469 719,1492.23 719,1529.18 731,1541.18 793.37,1603.54 808.54,1603.54 878,1673 1346.9,1673 1420.9,1747 1547,1747 H3.10@1720,1920
A10: H3.11 U5.87 | length 1627.1
  L1 w6: v1(745,1503) 747.77,1503 772,1478.77 772,1355.84 U5.87@850.12,1277.72
  L4 w6: v1(745,1503) 745,1529.72 800.82,1585.54 816,1585.54 885.46,1655 1354.35,1655 1428.35,1729 1586.94,1729 1705.94,1848 1736.54,1848 1769,1880.46 1769,1969 H3.11@1820,2020
A11: H3.12 U5.86 | length 1496.6
  L1 w6: v1(798,1469) 798,1357.92 844.72,1311.21 844.72,1310.96 U5.86@864.04,1291.64
  L4 w6: v1(798,1469) 795.23,1469 772,1492.23 772,1531.27 808.28,1567.54 823.46,1567.54 892.91,1637 1361.81,1637 1435.81,1711 1594.39,1711 1713.39,1830 1744,1830 1807.45,1893.45 1807.45,1895.01 1820,1907.57 H3.12@1820,1920
A12: H3.13 U5.85 | length 1650.3
  L1 w6: v1(798,1503) 801.44,1499.56 809.95,1499.56 824,1485.51 824,1359.52 U5.85@877.96,1305.56
  L4 w6: v1(798,1503) 800.27,1505.27 800.27,1533.27 816.54,1549.54 830.91,1549.54 900.37,1619 1369.27,1619 1443.27,1693 1699.27,1693 1797.04,1790.78 1797.04,1837.04 1868,1908 1868,1968 H3.13@1920,2020
A13: H3.14 U5.84 | length 1521.3
  L1 w6: v1(851,1469) 851,1360.6 891.88,1319.72 U5.84@891.88,1319.48
  L4 w6: v1@850,1469 847.23,1469 824,1492.23 824,1517.18 907.82,1601 914,1601 1376.72,1601 1450.72,1675 1706.72,1675 1815.04,1783.32 1815.04,1829.59 1877.54,1892.08 1899.43,1892.08 1920,1912.65 H3.14@1920,1920
A14: H3.15 U5.83 | length 1667.9
  L1 w6: v1@850.21,1503 869,1503 878,1494 878,1395.4 876.04,1393.44 876.04,1363.4 884.2,1355.24 905.79,1333.64 U5.83@905.79,1333.4
  L4 w6: v1@850,1503 851.61,1504.61 851.61,1519.33 915.28,1583 921.46,1583 1384.18,1583 1458.18,1657 1714.18,1657 1833.04,1775.87 1833.04,1822.13 1885,1874.08 1947.08,1874.08 1967,1894 1967,1967 H3.15@2020,2020
  other v1: 851,1503
A15: H3.16 U5.82 | length 1552.9
  L1 w6: v1(904,1469) 904,1395.95 894.04,1385.98 894.04,1373.24 U5.82@919.71,1347.56
  L4 w6: v1@902,1469 899.67,1469 893.08,1475.59 892.64,1475.59 878,1490.23 878,1515.77 927.23,1565 1391.63,1565 1465.63,1639 1721.63,1639 1851.04,1768.41 1851.04,1814.68 1892.45,1856.08 1954.54,1856.08 1976.46,1878 2015.31,1878 2020,1882.69 H3.16@2020,1920
AREF: C10.1 H1.09 U5.98 | length 1475.4
  L1 w6: v1(519,652) 519,710.54 C10.1@519.46,711 521.43,711 569,758.57 569,932.54 542,959.54 542,1023.31 537.31,1028 531.23,1028 516,1043.23 516,1064.77 531.23,1080 587.23,1080 657.52,1150.29 671.08,1150.29 696.76,1124.61 U5.98@697,1124.61
  L4 w6: v1(519,652) 519,594.46 706.46,407 907.22,407 958.23,355.98 958.23,217.46 H1.09@920,179.23
D0: H1.11 R13.2 U5.2 | length 1722.6
  L1 w6: U5.2@683.08,989.31 683.33,989.31 720.16,1026.14 813.31,1026.14 839.46,1000 v1@840,1000 ; R13.2@975.13,359 974.73,359 936,320.27 936,250 993.83,192.17 994.63,192.17 1007.57,179.23 H1.11@1020,179.23
  L4 w6: v1(840,999) 840,996.23 867,969.23 867,763.37 795.63,692 667.32,692 609,633.68 609,555.37 721.37,443 922.13,443 1020,345.13 H1.11@1020,179.23
D1: H1.12 R14.2 U5.3 | length 1837.4
  L1 w6: U5.3@697,975.39 697.25,975.39 728.86,1007 763,1007 771,999 v1(803.69,999) ; R14.2@974.13,288.99 974.13,247.87 991,231 1039,231 1070,200 1070,129.23 H1.12@1020,79.23
  L4 w6: v1(803.69,999) 803.69,998.31 803.92,998.31 849,953.23 849,770.82 788.18,710 659.86,710 591,641.14 591,547.91 713.91,425 914.67,425 976.23,363.44 976.23,154.77 1014,117 1017.49,113.51 1017.49,81.75 H1.12@1020,79.23
D2: H1.13 U5.6 | length 1582.4
  L1 w6: U5.6@738.76,933.63 739.01,933.63 778.37,973 850.77,973 874,996.23 v1(874,999)
  L4 w6: v1(874,999) 874,1001.77 897.23,1025 918.77,1025 934,1009.77 934,988.23 903,957.23 903,748.46 810.54,656 682.23,656 667,640.77 645,618.77 645,570.28 736.28,479 937.04,479 1120,296.04 H1.13@1120,179.23
D3: H1.14 U5.7 | length 1622.7
  L1 w6: U5.7@752.93,919.71 788.15,954.94 846.94,954.94 847,955 866.77,955 908,996.23 v1(908,999)
  L4 w6: v1(908,999) 908,996.23 885,973.23 885,755.91 803.09,674 674.77,674 627,626.23 627,562.82 728.82,461 929.58,461 1074,316.58 1074,125.23 H1.14@1120,79.23
D4: H1.15 U5.1 | length 1262.3
  L1 w6: U5.1@669.16,1003.23 649.84,983.91 649.84,983.67 643.49,977.31 643.49,939.11 758.69,823.91 758.69,817.28 667,725.6 667,619.23 690.23,596 v1@694,596
  L4 w6: v1(693,596) 696.06,592.94 696.06,582.62 763.69,515 951.95,515 1217.76,249.19 1217.76,181.47 H1.15@1220,179.23
D5: H1.16 U5.5 | length 1324.1
  L1 w6: v1(693,630) 693,633.69 702,642.69 702,672.02 780,750.02 780,828.05 699.16,908.89 699.16,921.63 705.52,927.99 705.52,928.23 U5.5@724.84,947.55
  L4 w6: v1(693,630) 689.94,626.94 678.63,626.94 663,611.31 663,580.1 746.1,497 944.5,497 1174,267.5 1174,108.74 1176.34,106.39 1194.71,88.02 1211.21,88.02 H1.16@1220,79.23
D6: H1.17 U5.15 | length 1056.8
  L1 w6: v1(746,596) 743.23,596 720,619.23 720,664.57 844.47,789.04 844.72,789.04 U5.15@864.04,808.36
  L4 w6: v1(746,596) 749.06,592.94 749.06,581.62 779.69,551 966.86,551 1274.86,243 1288.71,243 1318.2,213.51 1318.2,181.03 H1.17@1320,179.23
D7: H1.18 U5.16 | length 1140.6
  L1 w6: v1(746,630) 746,662.73 858.39,775.12 858.64,775.12 U5.16@877.96,794.44
  L4 w6: v1(746,630) 743.23,630 720,606.77 720,585.23 772.23,533 959.41,533 1268,224.41 1268,186.26 1268,140 1272.87,135.13 1320,88 H1.18@1320,79.23
D8: H1.19 U5.17 | length 1117.6
  L1 w6: U5.17@891.88,780.52 892.12,780.52 935.6,824 994,824 1017,801 v1@1055,801 ; v1(959,595) v1(1036,595)
  L4 w6: v1(959,595) 960.58,593.42 975.36,593.42 1289.78,279 1303.63,279 1376.02,206.6 1398.89,206.6 1420,185.49 H1.19@1420,179.23 ; v1(1036,595) 1036,597.06 1055,616.06 v1(1055,800.23)
D9: H1.20 U5.18 | length 1128.1
  L1 w6: v1@798,632 798.95,632.95 798.95,660 886.23,747.28 886.47,747.28 U5.18@905.79,766.6
  L4 w6: v1@798,630 795.23,630 772,606.77 772,585.23 788.23,569 974.32,569 1282.32,261 1296.17,261 1369,188.17 1369,130.23 H1.20@1420,79.23
  other v1: 799,630
D10: H1.21 U5.23 | length 1057.3
  L1 w6: U5.23@975.39,697 975.64,697 1001.32,722.68 1031.29,722.68 1086.64,778.03 1086.64,797.88 v1(1089,800.23)
  L4 w6: v1(1089,800.23) 1114.23,775 1135.77,775 1143.77,783 1212.9,783 1270.89,725.01 1270.89,704.69 1266.2,700 1263.23,700 1248,684.77 1248,661 1256,653 1256,624.63 1520,360.63 H1.21@1520,179.23
D11: H1.22 U5.24 | length 914.4
  L1 w6: v1(958,629) 958.68,629.68 958.68,652.2 989.31,682.84 U5.24@989.31,683.08
  L4 w6: v1(958,629) 979.08,629 994.04,614.04 1010,598.08 1010,584.23 1297.23,297 1311.08,297 1383.48,224.6 1446.97,224.6 1470,201.57 1470,129.23 1507.77,91.46 1507.77,79.23 H1.22@1520,79.23
D12: H1.23 U5.25 | length 1082.2
  L1 w6: U5.25@1003.23,669.16 1121.94,787.87 1121.94,797.94 v1(1125,801)
  L4 w6: v1(1125,801) 1220.35,801 1300,721.35 1300,631.54 1637.83,293.72 1637.83,235.37 1617,214.54 1617,182.23 H1.23@1620,179.23
D13: H1.24 R8.1 U5.26 | length 1613.6
  L1 w6: R8.1@782.13,481.03 783.19,482.09 783.19,508.42 789.88,515.11 1080.3,515.11 ; U5.26@1096.77,669.16 1080.3,652.7 1080.3,515.11 ; v1(1274,674) 1274,610 1274,540 1249.11,515.11 1080.3,515.11
  L4 w6: v1(1274,674) 1274,632.09 1538,368.09 1538,354 1619.83,272.17 1619.83,242.83 1604.83,227.83 1590.83,227.83 1573,210 1573,123 1616.77,79.23 H1.24@1620,79.23
D14: H1.25 U5.64 | length 1531.1
  L1 w6: v1(1054,891) 1054,943 1160,1049 1160,1187.84 U5.64@1249.88,1277.72
  L4 w6: v1(1054,891) 1054,889.23 1080.23,863 1125.77,863 1142.77,846 1226.27,846 1336,736.27 1336,646.46 1683,299.46 1683,216.23 H1.25@1720,179.23